# EAGLE board PCB_2D_EBOOK (EAGLE 9.7.0)
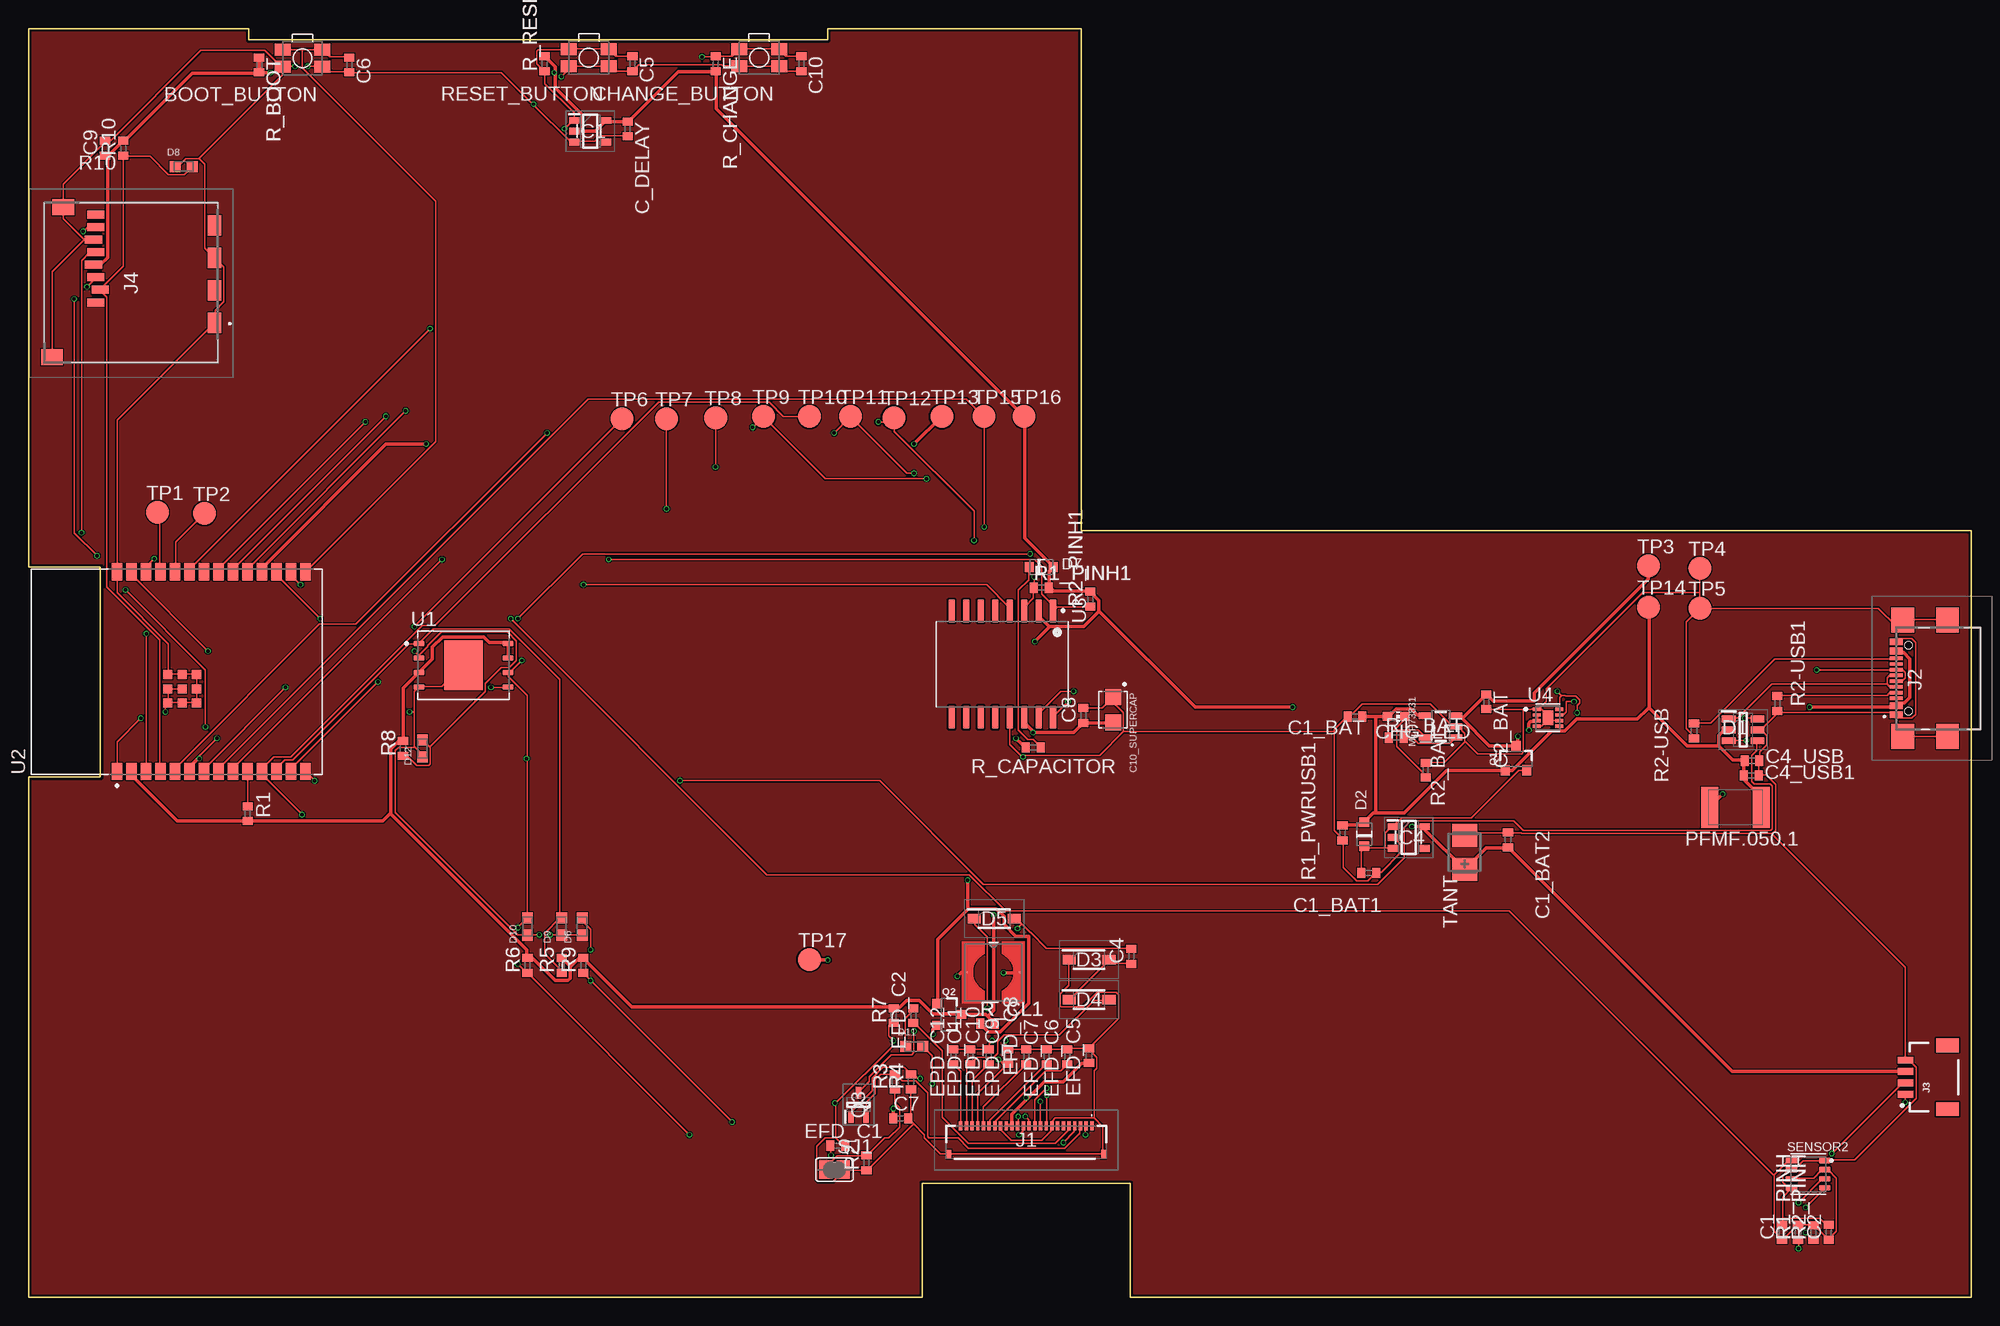
[diagram p0: board, top side]
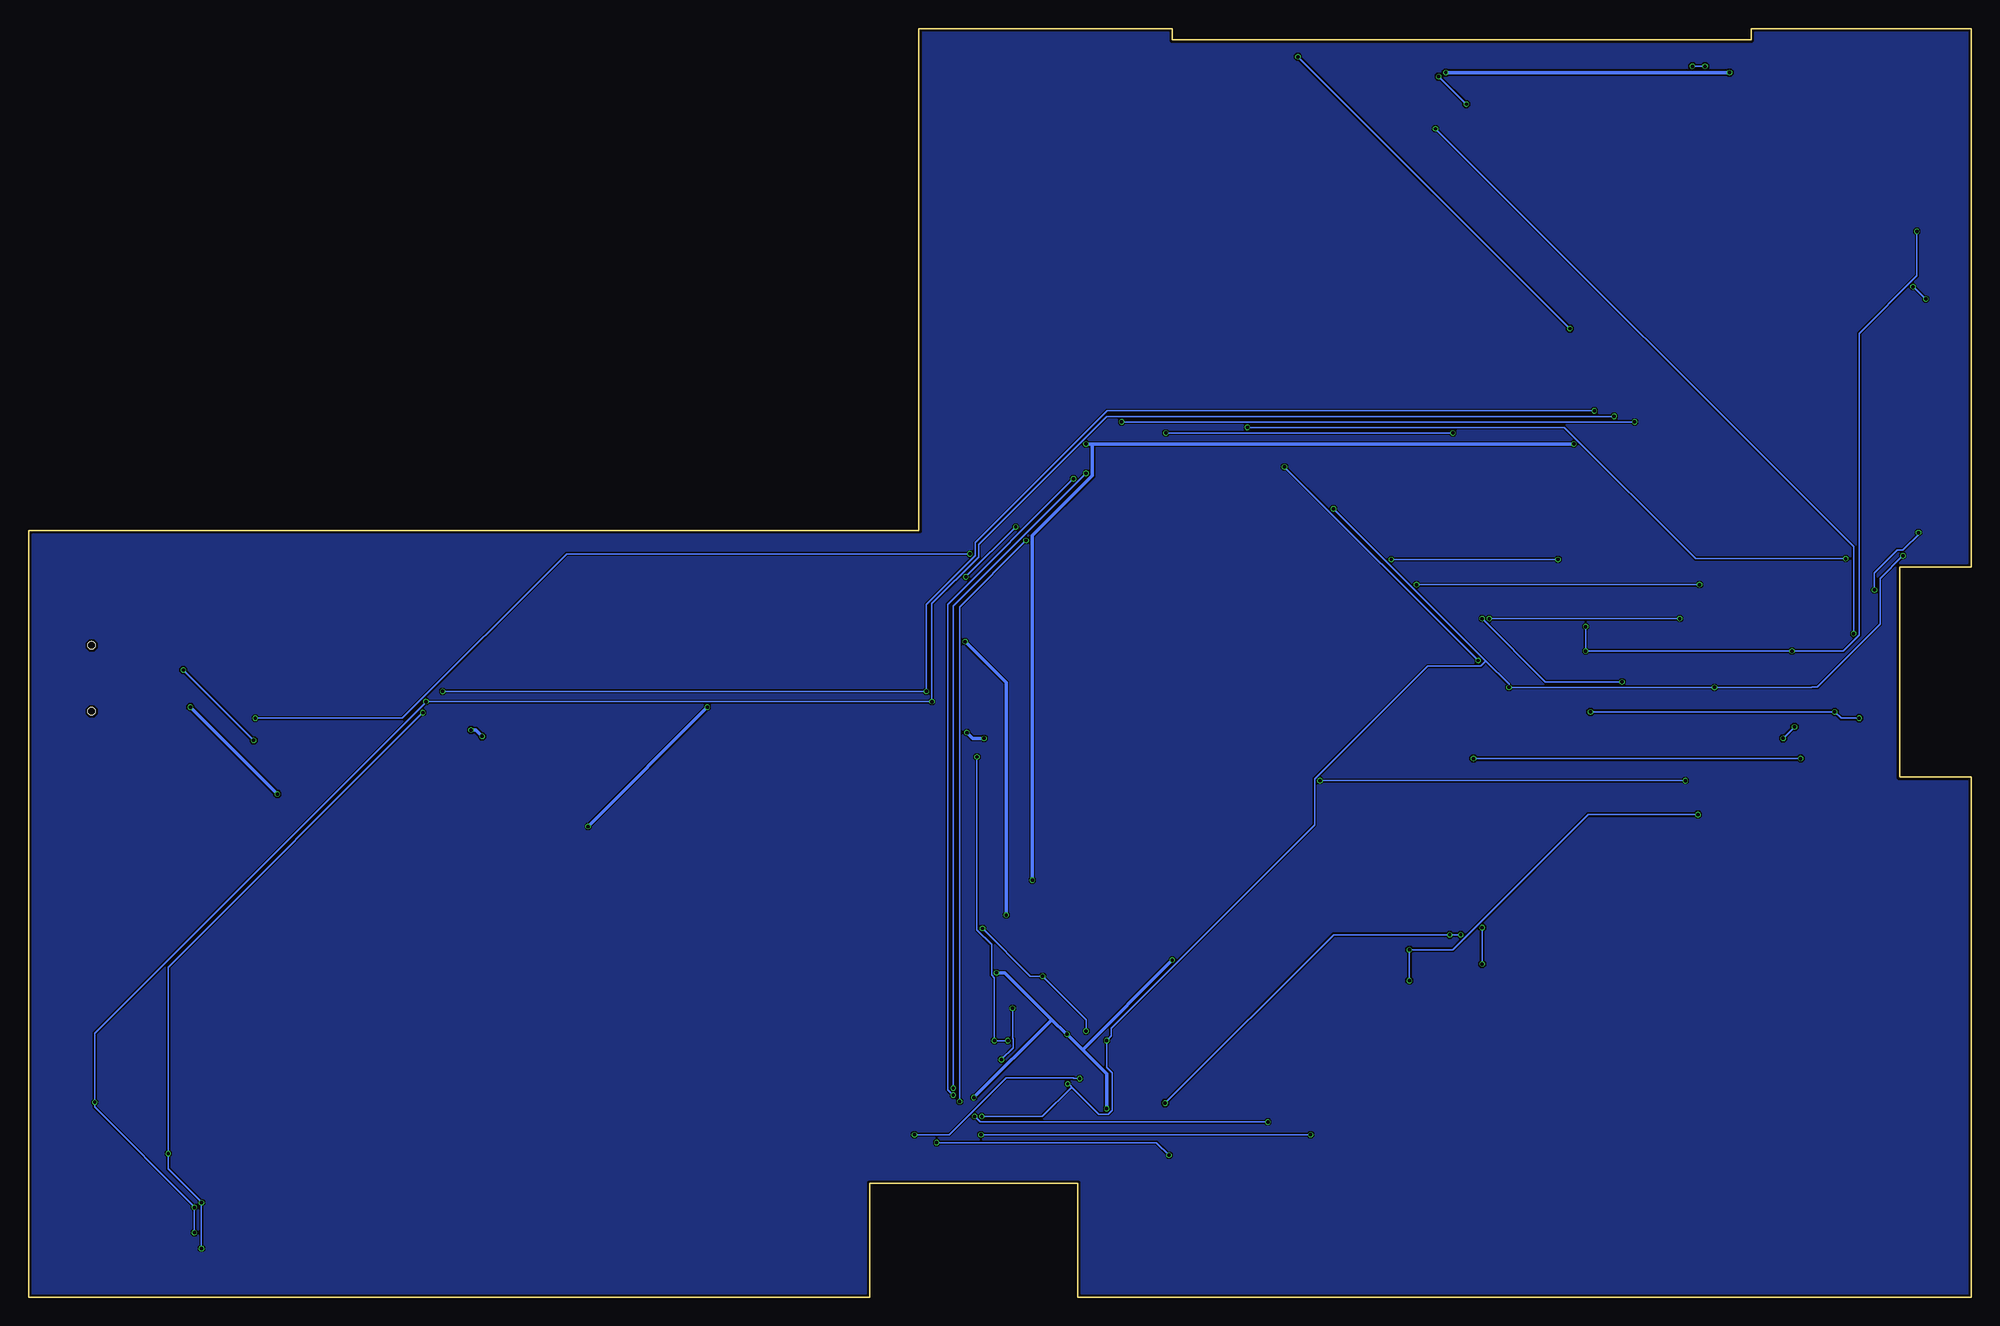
[diagram p1: board, bottom side, seen from below]

Size 170.2 x 111.2 mm. Coordinates in mm from the lower left corner, seen from the top.
Outline: 0,0 78.3,0 78.3,10 96.5,10 96.5,0 170.2,0 170.2,67.2 92.2,67.2 92.2,111.2 70,111.2 70,110.2 19.3,110.2 19.3,111.2 0,111.2 0,64 6.3,64 6.3,45.6 0,45.6 0,0
Copper layers (1*16): Top / Bottom
Stack-up Default Layer Stack: Top User Defined 0.035mm / Dielectric-1 User Defined 1.6mm / Bottom User Defined 0.035mm
Design rules: minimum copper width classes=0 0.15mm, minimum copper width classes=1 0.3mm, minimum drill size 0.3mm, copper clearance wire_polygon to wire_polygon 5mil, copper clearance wire_polygon to pad_smd 5mil, copper clearance wire_polygon to via 5mil, copper clearance pad_smd to pad_smd 5mil, copper clearance pad_smd to via 5mil, copper clearance via to via 5mil, copper clearance smd to pad (same net) 5mil, copper clearance smd to via (same net) 5mil, copper clearance smd to smd (same net) 5mil, dimension clearance 0.2mm, via restrict clearance 0mil, restrict clearance 0mil, drill distance 6mil, keepout clearance 0mil
Net classes: 0 default: width 0.15 mm; 1 POWER: width 0.3 mm

## Footprints (pad centres in the part's own frame; a part is rotated, then mirrored left to right if it is on the bottom)
MYBUTTON = smd 1.4 x 1.05: 1 1.75,0.75; 2 -1.75,0.75; 3 -1.75,-0.75; 4 1.75,-0.75
EAGLE-LTSPICE_C0402 = smd 0.7 x 0.9: 1 -0.65,0; 2 0.65,0
CAPCP3225X100N = smd 1.4 x 1.4: 1 -1.1,0; 2 1.1,0
ADAFRUIT_CHIP-LED0603 = smd 0.8 x 0.8: A 0,-0.75; C 0,0.75
SOT95P280X145-6N = smd 1.2 x 0.6: 1 -1.25,0.95; 2 -1.25,0; 3 -1.25,-0.95; 4 1.25,-0.95; 5 1.25,0; 6 1.25,0.95
ESP32_WROVER_AVX---SD0805S020S1R0_AVX_SD0805S020S1R0_0 = smd 0.8 x 0.9: 1 -1.05,0; 2 1.05,0
SOD3716X135N = smd 1.15 x 0.8: 1 -1.75,0; 2 1.75,0
DIOC1608X36N = smd 0.97 x 0.94: 1 -0.75,0; 2 0.75,0
SOT95P280X125-5N = smd 0.9 x 0.6: 1 -1.4,0.95; 2 -1.4,0; 3 -1.4,-0.95; 4 1.4,-0.95; 5 1.4,0.95
SOT95P280X120-5N = smd 0.9 x 0.6: 1 -1.4,0.95; 2 -1.4,0; 3 -1.4,-0.95; 4 1.4,-0.95; 5 1.4,0.95
FH34SRJ24S05SH99 = smd 0.3 x 0.8: 1 5.75,1.45; 2 5.25,1.45; 3 4.75,1.45; 4 4.25,1.45; 5 3.75,1.45; 6 3.25,1.45; 7 2.75,1.45; 8 2.25,1.45; 9 1.75,1.45; 10 1.25,1.45; 11 0.75,1.45; 12 0.25,1.45; 13 -0.25,1.45; 14 -0.75,1.45; 15 -1.25,1.45; 16 -1.75,1.45; 17 -2.25,1.45; 18 -2.75,1.45; 19 -3.25,1.45; 20 -3.75,1.45; 21 -4.25,1.45; 22 -4.75,1.45; 23 -5.25,1.45; 24 -5.75,1.45 | smd 0.4 x 0.8: MP1 6.75,-1.05; MP2 -6.75,-1.05
SAMACSYS_PARTS_USB4110GFA = smd 0.3 x 1.15: A1 -3.35,3.678; A4 -2.55,3.678; A5 -1.25,3.678; A6 -0.25,3.678; A7 0.25,3.678; A8 1.25,3.678; A9 2.55,3.678; A12 3.35,3.678; B1 3.05,3.678; B4 2.25,3.678; B5 1.75,3.678; B6 0.75,3.678; B7 -0.75,3.678; B8 -1.75,3.678; B9 -2.25,3.678; B12 -3.05,3.678 | smd 2.18 x 2: MP1 -5.11,-0.827; MP2 5.11,-0.827; MP3 -5.11,3.103; MP4 5.11,3.103 | hole 0.65: -2.89,2.603; 2.89,2.603
JST04_1MM_RA = smd 0.6 x 1.35: 1 -1.5,0; 2 -0.5,0; 3 0.5,0; 4 1.5,0 | smd 1.2 x 2: NC1 2.8,-3.675; NC2 -2.8,-3.675
112ATAARR03ATTEND = smd 1.8 x 1.2: G1 10.6,10.4; G2 4.9,10.4; S1 7.75,10.4; S2 2.05,10.4 | smd 1.4 x 1.9: G3 13.6,-3.85; G4 0.45,-2.85 | smd 0.7 x 1.5: P1 8.8,0; P2 7.7,0.4; P3 6.6,0; P4 5.5,-0.2; P5 4.4,0; P6 3.3,-0.2; P7 2.2,0; P8 1.1,0
IND_4828-WE-TPC_WRE = smd 0.127 x 0.127: 1 -2.286,0; 2 2.286,0
ESP32_WROVER_SPARKFUN-IC-POWER_SOT23-5 = smd 0.55 x 1.2: 1 -0.95,-1.3; 2 0,-1.3; 3 0.95,-1.3; 4 0.95,1.3; 5 -0.95,1.3
ESP32C6_VARISTOR_CT/CN1812 = smd 1.5 x 3.6: 1 -2.25,0; 2 2.25,0
ESP32_WROVER_SPARKFUN-DISCRETESEMI_SOT23-3 = smd 0.8 x 0.9: 1 -0.95,-1; 2 0.95,-1; 3 0,1.1
SOT65P210X110-3N = smd 1.05 x 0.5: 1 -1.05,0.65; 2 -1.05,-0.65; 3 1.05,0
ESP32_WROVER_EAGLE-LTSPICE_R0402 = smd 0.7 x 0.9: 1 -0.65,0; 2 0.65,0
ESP32_WROVER_BME680_PSON80P300X300X100-8N = smd 1.016 x 0.5: 1 1.458,1.2; 2 1.458,0.4; 3 1.458,-0.4; 4 1.458,-1.2; 5 -1.458,-1.22; 6 -1.458,-0.4; 7 -1.458,0.4; 8 -1.458,1.2
SJ = smd 1.168 x 1.6: 1 -0.762,0; 2 0.762,0
RCL_CT3528 = smd 2 x 2.2: + -1.5,0; - 1.5,0
TP20R = smd 2 x 2: TP 0,0
SON127P600X800X80-9N = smd 0.94 x 0.44: 1 -3.895,1.905; 2 -3.895,0.635; 3 -3.895,-0.635; 4 -3.895,-1.905; 5 3.895,-1.905; 6 3.895,-0.635; 7 3.895,0.635; 8 3.895,1.905 | smd 3.4 x 4.3: 9 0,0
XCVR_ESP32-C6-WROOM-1-N8 = smd 1.5 x 0.9: 1 -8.75,5.26; 2 -8.75,3.99; 3 -8.75,2.72; 4 -8.75,1.45; 5 -8.75,0.18; 6 -8.75,-1.09; 7 -8.75,-2.36; 8 -8.75,-3.63; 9 -8.75,-4.9; 10 -8.75,-6.17; 11 -8.75,-7.44; 12 -8.75,-8.71; 13 -8.75,-9.98; 14 -8.75,-11.25; 15 8.75,-11.25; 16 8.75,-9.98; 17 8.75,-8.71; 18 8.75,-7.44; 19 8.75,-6.17; 20 8.75,-4.9; 21 8.75,-3.63; 22 8.75,-2.36; 23 8.75,-1.09; 24 8.75,0.18; 25 8.75,1.45; 26 8.75,2.72; 27 8.75,3.99; 28 8.75,5.26 | smd 0.8 x 0.8: 29_1 -2.755,0.79; 29_2 -1.505,0.79; 29_3 -0.255,0.79; 29_4 -2.755,-0.46; 29_5 -1.505,-0.46; 29_6 -0.255,-0.46; 29_7 -2.755,-1.71; 29_8 -1.505,-1.71; 29_9 -0.255,-1.71
SOIC127P1032X265-16N = smd 2.05 x 0.59: 1 -4.655,4.445; 2 -4.655,3.175; 3 -4.655,1.905; 4 -4.655,0.635; 5 -4.655,-0.635; 6 -4.655,-1.905; 7 -4.655,-3.175; 8 -4.655,-4.445; 9 4.655,-4.445; 10 4.655,-3.175; 11 4.655,-1.905; 12 4.655,-0.635; 13 4.655,0.635; 14 4.655,1.905; 15 4.655,3.175; 16 4.655,4.445
SON50P200X200X80-9N = smd 0.76 x 0.27: 1 -0.985,0.75; 2 -0.985,0.25; 3 -0.985,-0.25; 4 -0.985,-0.75; 5 0.985,-0.75; 6 0.985,-0.25; 7 0.985,0.25; 8 0.985,0.75 | smd 0.9 x 1.3: 9 0,0

## Placement (x,y rotation side)
BOOT_BUTTON  BUTTON_CUSYOMV1  [MYBUTTON]  24,108.6 180 top
C1  100nF  [EAGLE-LTSPICE_C0402]  153.6,5.7 90 top
C1_BAT  4.7uF  [EAGLE-LTSPICE_C0402]  116.2,50.9 180 top
C1_BAT1  4.7uF  [EAGLE-LTSPICE_C0402]  117.4,37.2 0 top
C1_BAT2  4.7uF  [EAGLE-LTSPICE_C0402]  129.6,40.1 90 top
C2  100nF  [EAGLE-LTSPICE_C0402]  157.7,5.7 90 top
C2_BAT  4.7uF  [EAGLE-LTSPICE_C0402]  127.7,52.2 270 top
C4  4.7uF/25V  [EAGLE-LTSPICE_C0402]  96.6,29.9 90 top
C4_USB  4.7uF  [EAGLE-LTSPICE_C0402]  150.98,47.04 0 top
C4_USB1  100nF  [EAGLE-LTSPICE_C0402]  150.91,45.75 0 top
C5  1uF  [EAGLE-LTSPICE_C0402]  52.9,108.11 270 top
C6  100nF  [EAGLE-LTSPICE_C0402]  28.1,108.01 270 top
C7  10uF  [EAGLE-LTSPICE_C0402]  76.4,15.7 0 top
C8  100nF  [EAGLE-LTSPICE_C0402]  92.4,51 90 top
C9  100nF  [EAGLE-LTSPICE_C0402]  6.7,100.72 90 top
C10  100nF  [EAGLE-LTSPICE_C0402]  67.7,108.11 270 top
C10_SUPERCAP  CPH3225A  [CAPCP3225X100N]  95,51.5 270 top
C_DELAY  100nF  [EAGLE-LTSPICE_C0402]  52.5,102.4 270 top
CHANGE_BUTTON  BUTTON_CUSYOMV1  [MYBUTTON]  64,108.65 180 top
CHG_LED  [ADAFRUIT_CHIP-LED0603]  119.8,50.9 270 top
D1  USBLC6-2SC6Y  [SOT95P280X145-6N]  150.19,49.74 0 top
D2  ESP32_WROVER_AVX---SD0805S020S1R0_AVX_SD0805S020S1R0_0_0AVX_SD0805S020S1R0_0_0  [ESP32_WROVER_AVX---SD0805S020S1R0_AVX_SD0805S020S1R0_0]  117,40.6 90 top
D3  MBR0530  [SOD3716X135N]  92.9,29.6 0 top
D4  MBR0530  [SOD3716X135N]  92.9,26.1 0 top
D5  MBR0530  [SOD3716X135N]  84.6,33.2 0 top
D6  PGB1010603MR  [DIOC1608X36N]  48.5,32.5 90 top
D7  ESP32_WROVER_AVX---SD0805S020S1R0_AVX_SD0805S020S1R0_0_0AVX_SD0805S020S1R0_0_0  [ESP32_WROVER_AVX---SD0805S020S1R0_AVX_SD0805S020S1R0_0]  88.7,64 0 top
D8  PGB1010603MR  [DIOC1608X36N]  13.6,99.1 0 top
D9  PGB1010603MR  [DIOC1608X36N]  46.7,32.5 90 top
D10  PGB1010603MR  [DIOC1608X36N]  43.7,32.5 90 top
D11  PGB1010603MR  [DIOC1608X36N]  77.6,22 0 top
D12  PGB1010603MR  [DIOC1608X36N]  34.5,48.1 90 top
EFD_C1  1uF/50V  [EAGLE-LTSPICE_C0402]  70.9,13.3 0 top
EFD_C2  1uF/50V  [EAGLE-LTSPICE_C0402]  77.5,24.7 90 top
EFD_C5  1uF/50V  [EAGLE-LTSPICE_C0402]  92.9,21.2 90 top
EFD_C6  1uF/50V  [EAGLE-LTSPICE_C0402]  91,21.1 90 top
EFD_C7  1uF/50V  [EAGLE-LTSPICE_C0402]  89.2,21.1 90 top
EPD_C8  1uF/50V  [EAGLE-LTSPICE_C0402]  87.4,21.1 90 top
EPD_C9  1uF/50V  [EAGLE-LTSPICE_C0402]  85.8,21.1 90 top
EPD_C10  1uF/50V  [EAGLE-LTSPICE_C0402]  84.1,21.1 90 top
EPD_C11  1uF/50V  [EAGLE-LTSPICE_C0402]  82.5,21.1 90 top
EPD_C12  1uF/50V  [EAGLE-LTSPICE_C0402]  81,21.1 90 top
IC1  BD5229G-TR  [SOT95P280X125-5N]  49.2,102.2 0 top
IC4  XC6220A331MR-G  [SOT95P280X120-5N]  120.9,40.3 0 top
J1  FH34SRJ-24S-0.5SH_99_  [FH34SRJ24S05SH99]  87.4,13.6 0 top
J2  SAMACSYS_PARTS_USB4110-GF-A  [SAMACSYS_PARTS_USB4110GFA]  167.28,54.26 90 top
J3  QWIIC_RIGHT_ANGLE  [JST04_1MM_RA]  164.43,19.3 90 top
J4  112A-TAAR-R03_ATTEND  [112ATAARR03ATTEND]  5.89,96 270 top
L1  744043680IND_4828-WE-TPC_WRE  [IND_4828-WE-TPC_WRE]  84.51,28.5 0 top
MCP73831  ESP32_WROVER_SPARKFUN-IC-POWER_MCP73831  [ESP32_WROVER_SPARKFUN-IC-POWER_SOT23-5]  123.7,50.03 90 top
PFMF.050.1  ESP32C6_VARISTORCN1812  [ESP32C6_VARISTOR_CT/CN1812]  149.52,42.96 0 top
Q1  20V/4.2A/52mΩ/1.4W  [ESP32_WROVER_SPARKFUN-DISCRETESEMI_SOT23-3]  130.3,47.2 0 top
Q2  20V/4.2A/52mΩ/1.4W  [ESP32_WROVER_SPARKFUN-DISCRETESEMI_SOT23-3]  80.6,24.8 270 top
Q3  SI1308EDL-T1-GE3  [SOT65P210X110-3N]  72.7,16.9 90 top
R1  10K  [ESP32_WROVER_EAGLE-LTSPICE_R0402]  19.2,42.4 270 top
R1_BAT  200  [ESP32_WROVER_EAGLE-LTSPICE_R0402]  119.82,49.06 0 top
R1_PINH  10K  [ESP32_WROVER_EAGLE-LTSPICE_R0402]  155,5.7 90 top
R1_PINH1  10K  [ESP32_WROVER_EAGLE-LTSPICE_R0402]  88.7,62.2 0 top
R1_PWRUSB1  100K  [ESP32_WROVER_EAGLE-LTSPICE_R0402]  115.1,40.7 90 top
R2  2.2  [ESP32_WROVER_EAGLE-LTSPICE_R0402]  73.4,11.8 90 top
R2-USB  5k1  [ESP32_WROVER_EAGLE-LTSPICE_R0402]  145.89,49.64 270 top
R2-USB1  10K  [ESP32_WROVER_EAGLE-LTSPICE_R0402]  153.18,52.05 90 top
R2_BAT  2K  [ESP32_WROVER_EAGLE-LTSPICE_R0402]  122.4,46.2 270 top
R2_PINH  10K  [ESP32_WROVER_EAGLE-LTSPICE_R0402]  156.35,5.69 90 top
R2_PINH1  10K  [ESP32_WROVER_EAGLE-LTSPICE_R0402]  93,61.2 90 top
R3  0.47  [ESP32_WROVER_EAGLE-LTSPICE_R0402]  75.9,18.9 90 top
R4  10K  [ESP32_WROVER_EAGLE-LTSPICE_R0402]  77.3,18.9 90 top
R5  10K  [ESP32_WROVER_EAGLE-LTSPICE_R0402]  46.7,29.1 90 top
R6  10K  [ESP32_WROVER_EAGLE-LTSPICE_R0402]  43.7,29.1 90 top
R7  10K  [ESP32_WROVER_EAGLE-LTSPICE_R0402]  75.8,24.7 90 top
R8  10K  [ESP32_WROVER_EAGLE-LTSPICE_R0402]  32.8,48.1 90 top
R9  10K  [ESP32_WROVER_EAGLE-LTSPICE_R0402]  48.6,29.1 90 top
R10  10K  [ESP32_WROVER_EAGLE-LTSPICE_R0402]  8.3,100.7 90 top
R_BOOT  10K  [ESP32_WROVER_EAGLE-LTSPICE_R0402]  20.2,108.01 270 top
R_CAPACITOR  15  [ESP32_WROVER_EAGLE-LTSPICE_R0402]  88,48.2 180 top
R_CHANGE  10K  [ESP32_WROVER_EAGLE-LTSPICE_R0402]  60.2,108.11 270 top
R_CL1  10K  [ESP32_WROVER_EAGLE-LTSPICE_R0402]  84,24 0 top
R_RESET  10K  [ESP32_WROVER_EAGLE-LTSPICE_R0402]  45.2,108.11 90 top
RESET_BUTTON  BUTTON_CUSYOMV1  [MYBUTTON]  49.08,108.65 180 top
SENSOR2  ESP32_WROVER_BME680_BME680  [ESP32_WROVER_BME680_PSON80P300X300X100-8N]  155.9,10.8 0 top
SJ1  [SJ]  70.6,11.2 180 top
TANT  100uF  [RCL_CT3528]  125.8,39 90 top
TP1  TPTP20R  [TP20R]  11.3,68.8 0 top
TP2  TPTP20R  [TP20R]  15.4,68.7 0 top
TP3  TPTP20R  [TP20R]  141.9,64.1 0 top
TP4  TPTP20R  [TP20R]  146.4,63.9 0 top
TP5  TPTP20R  [TP20R]  146.4,60.4 0 top
TP6  TPTP20R  [TP20R]  52,77 0 top
TP7  TPTP20R  [TP20R]  55.9,77 0 top
TP8  TPTP20R  [TP20R]  60.2,77.1 0 top
TP9  TPTP20R  [TP20R]  64.4,77.2 0 top
TP10  TPTP20R  [TP20R]  68.4,77.2 0 top
TP11  TPTP20R  [TP20R]  72,77.2 0 top
TP12  TPTP20R  [TP20R]  75.8,77.1 0 top
TP13  TPTP20R  [TP20R]  80,77.2 0 top
TP14  TPTP20R  [TP20R]  141.9,60.5 0 top
TP15  TPTP20R  [TP20R]  83.7,77.2 0 top
TP16  TPTP20R  [TP20R]  87.2,77.2 0 top
TP17  TPTP20R  [TP20R]  68.4,29.6 0 top
U1  W25Q512JVEIQ  [SON127P600X800X80-9N]  38.1,55.4 0 top
U2  ESP32-C6-WROOM-1-N8  [XCVR_ESP32-C6-WROOM-1-N8]  13,54.84 90 top
U3  DS3231SN#  [SOIC127P1032X265-16N]  85.3,55.5 270 top
U4  MAX17048G+T10  [SON50P200X200X80-9N]  133.1,50.8 0 top

## Library data of the parts
BOOT_BUTTON CHANGE_BUTTON CHG_LED PFMF.050.1 RESET_BUTTON SJ1 TP1-TP17 = DeskAssistant v19 v1
C1 C1_BAT C1_BAT1 C1_BAT2 C2 C2_BAT C4 C4_USB C4_USB1 C5-C10 C_DELAY EFD_C1 EFD_C2 EFD_C5-EFD_C7 EPD_C8-EPD_C12 = DeskAssistant v19 v1; SPICEMODEL: NONE; SPICEPREFIX: C
C10_SUPERCAP = DeskAssistant v19 v1; AVAILABILITY: Not in stock; CHECK_PRICES: https://www.snapeda.com/parts/CPH3225A/Seiko+Instruments/view-part/?ref=eda; DESCRIPTION: 11 mF (EDLC) Supercapacitor 3.3 V 1210 (3225 Metric) - -; MF: Seiko Instruments; MP: CPH3225A; PACKAGE: 1210 Seiko; PRICE: None; PURCHASE-URL: https://www.snapeda.com/api/url_track_click_mouser/?unipart_id=562593&manufacturer=Seiko Instruments&part_name=CPH3225A&search_term=None; SNAPEDA_LINK: https://www.snapeda.com/parts/CPH3225A/Seiko+Instruments/view-part/?ref=snap
D1 = DeskAssistant v19 v1; AVAILABILITY: In Stock; CHECK_PRICES: https://www.snapeda.com/parts/USBLC6-2SC6Y/STMicroelectronics/view-part/?ref=eda; DESCRIPTION: 17V Clamp 5A (8/20µs) Ipp Tvs Diode Surface Mount SOT-23-6; MF: STMicroelectronics; MP: USBLC6-2SC6Y; PACKAGE: SOT-23-6 STMicroelectronics; PRICE: None; SNAPEDA_LINK: https://www.snapeda.com/parts/USBLC6-2SC6Y/STMicroelectronics/view-part/?ref=snap
D2 D7 = DeskAssistant v19 v1; CENTROID_NOT_SPECIFIED: No; DATASHEET: http://datasheets.avx.com/schottky.pdf; DIGIKEY_DESCRIPTION: DIODE SCHOTTKY 20V 1A 0805; DIGIKEY_PART_NUMBER: 478-7800-1-ND; LEAD_FREE: yes; MF: AVX; MOUSER_PART_NUMBER: 581-SD0805S020S1R0; PACKAGE: 0805 (2012 metric); PREFIX: D; ROHS: yes; TEMPERATURE_RANGE_HIGH: +125°C; TEMPERATURE_RANGE_LOW: -55°C
D3-D5 = DeskAssistant v19 v1; AVAILABILITY: In Stock; CHECK_PRICES: https://www.snapeda.com/parts/MBR0530/Onsemi/view-part/?ref=eda; DESCRIPTION: Diode Schottky 30 V 500mA Surface Mount SOD-123; MF: ON Semiconductor; MP: MBR0530; PACKAGE: SOD-123-2 ON Semiconductor; PRICE: None; PURCHASE-URL: https://www.snapeda.com/api/url_track_click_mouser/?unipart_id=179458&manufacturer=ON Semiconductor&part_name=MBR0530&search_term=None; SNAPEDA_LINK: https://www.snapeda.com/parts/MBR0530/Onsemi/view-part/?ref=snap
D6 D8-D12 = DeskAssistant v19 v1; AVAILABILITY: In Stock; CHECK_PRICES: https://www.snapeda.com/parts/PGB1010603MR/Littelfuse/view-part/?ref=eda; DESCRIPTION: 150V (Typ) Clamp - Ipp Tvs Diode Surface Mount 0603 (1608 Metric); MF: Littelfuse Inc.; MP: PGB1010603MR; PACKAGE: 0603 Littelfuse Inc.; PRICE: None; PURCHASE-URL: https://www.snapeda.com/api/url_track_click_mouser/?unipart_id=5659453&manufacturer=Littelfuse Inc.&part_name=PGB1010603MR&search_term=None; SNAPEDA_LINK: https://www.snapeda.com/parts/PGB1010603MR/Littelfuse/view-part/?ref=snap
IC1 = DeskAssistant v19 v1; DESCRIPTION: Voltage Detector with Adjustable Delay Time: CMOS processes are utilized to develop high precision, low current consumption CMOS reset ICs that allow arbitrary setting of the delay time. The extensive lineup includes both Nch Open Drain and CMOS output types in a wide range of detection voltages (from 2.3V to 6.0V, in 0.1V steps), enabling selection of the ideal solution based on customer requirements. In addition, the entire series is of course both lead-free and RoHS-compliant.; HEIGHT: 1.25mm; MANUFACTURER_NAME: ROHM Semiconductor; MANUFACTURER_PART_NUMBER: BD5229G-TR; MOUSER_PART_NUMBER: 755-BD5229G-TR; MOUSER_PRICE-STOCK: https://www.mouser.co.uk/ProductDetail/ROHM-Semiconductor/BD5229G-TR?qs=4kLU8WoGk0vvnhrrYwdszw%3D%3D
IC4 = DeskAssistant v19 v1; DESCRIPTION: LDO Voltage Regulators; HEIGHT: 1.2mm; MANUFACTURER_NAME: Torex; MANUFACTURER_PART_NUMBER: XC6220A331MR-G; MOUSER_PART_NUMBER: 865-XC6220A331MR-G; MOUSER_PRICE-STOCK: https://www.mouser.co.uk/ProductDetail/Torex-Semiconductor/XC6220A331MR-G?qs=AsjdqWjXhJ8ZSWznL1J0gg%3D%3D
J1 = DeskAssistant v19 v1; DESCRIPTION: 24 Position FFC, FPC Connector Contacts, Top and Bottom 0.020" (0.50mm) Surface Mount, Right Angle; HEIGHT: 1.1mm; MANUFACTURER_NAME: Hirose; MANUFACTURER_PART_NUMBER: FH34SRJ-24S-0.5SH(99); MOUSER_PART_NUMBER: 798-FH34SRJ24S05SH99; MOUSER_PRICE-STOCK: https://www.mouser.co.uk/ProductDetail/Hirose-Connector/FH34SRJ-24S-0.5SH99?qs=vcbW%252B4%252BSTIpKBl5ap9J8Fw%3D%3D
J2 = DeskAssistant v19 v1; DESCRIPTION: CONN USB 2.0 TYPE-C R/A SMT; HEIGHT: 3.26mm; MANUFACTURER_NAME: GCT (GLOBAL CONNECTOR TECHNOLOGY); MANUFACTURER_PART_NUMBER: USB4110-GF-A; MOUSER_PART_NUMBER: 640-USB4110-GF-A; MOUSER_PRICE-STOCK: https://www.mouser.co.uk/ProductDetail/GCT/USB4110-GF-A?qs=KUoIvG%2F9IlYiZvIXQjyJeA%3D%3D
J3 = DeskAssistant v19 v1; PROD_ID: CONN-13694
J4 = DeskAssistant v19 v1; DESCRIPTION: Micro SD Card Socket, Push-Push Type, Top Mount, SMT, H=1.83mm, 10u; HEIGHT: 1.9mm; MANUFACTURER_NAME: ATTEND; MANUFACTURER_PART_NUMBER: 112A-TAAR-R03 ATTEND
L1 = DeskAssistant v19 v1; COPYRIGHT: Copyright (C) 2024 Ultra Librarian. All rights reserved.; MANUFACTURER_PART_NUMBER: 744043680; MFR_NAME: Wurth Electronics
MCP73831 = DeskAssistant v19 v1; PROD_ID: IC-09995
Q1 Q2 = DeskAssistant v19 v1; PROD_ID: TRAN-14388
Q3 = DeskAssistant v19 v1; AVAILABILITY: In Stock; CHECK_PRICES: https://www.snapeda.com/parts/SI1308EDL-T1-GE3/Vishay+Siliconix/view-part/?ref=eda; DESCRIPTION: Si1308EDL-T1-GE3 N-channel MOSFET Transistor, 1.5 A, 30 V, 3-Pin SC-70 | Siliconix / Vishay SI1308EDL-T1-GE3; MF: Vishay Siliconix; MP: SI1308EDL-T1-GE3; PACKAGE: SOT-323 Vishay Semiconductor; PRICE: None; PURCHASE-URL: https://www.snapeda.com/api/url_track_click_mouser/?unipart_id=274603&manufacturer=Vishay Siliconix&part_name=SI1308EDL-T1-GE3&search_term=None; SNAPEDA_LINK: https://www.snapeda.com/parts/SI1308EDL-T1-GE3/Vishay+Siliconix/view-part/?ref=snap
R1 R1_BAT R1_PINH R1_PINH1 R1_PWRUSB1 R2 R2-USB R2-USB1 R2_BAT R2_PINH R2_PINH1 R3-R10 R_BOOT R_CAPACITOR R_CHANGE R_CL1 R_RESET = DeskAssistant v19 v1; SPICEMODEL: NONE; SPICEPREFIX: R
SENSOR2 = DeskAssistant v19 v1; AVAILABILITY: Unavailable; DESCRIPTION: Integrated Environmental Unit; MF: Bosch Sensortec; MP: BME680; PACKAGE: LGA-8 Bosch Tools; PRICE: None
TANT = DeskAssistant v19 v1; SPICEPREFIX: C
U1 = DeskAssistant v19 v1; AVAILABILITY: In Stock; CHECK_PRICES: https://www.snapeda.com/parts/W25Q512JVEIQ/Winbond+Electronics/view-part/?ref=eda; DESCRIPTION: FLASH - NOR Memory IC 512Mb (64M x 8) SPI - Quad I/O 133 MHz 8-WSON (8x6); MF: Winbond Electronics; MP: W25Q512JVEIQ; PACKAGE: Package; PRICE: None; SNAPEDA_LINK: https://www.snapeda.com/parts/W25Q512JVEIQ/Winbond+Electronics/view-part/?ref=snap
U2 = DeskAssistant v19 v1; AVAILABILITY: In Stock; CHECK_PRICES: https://www.snapeda.com/parts/ESP32-C6-WROOM-1-N8/Espressif+Systems/view-part/?ref=eda; DESCRIPTION: Multiprotocol Modules ESP32-C6 module, Wi-Fi 6 in 2.4 GHz band, Bluetooth 5, Zigbee 3.0 and Thread. ESP34-WROOM Compatible - ENGINEERING SAMPLE; MF: Espressif Systems; MP: ESP32-C6-WROOM-1-N8; PACKAGE: None; PRICE: None; SNAPEDA_LINK: https://www.snapeda.com/parts/ESP32-C6-WROOM-1-N8/Espressif+Systems/view-part/?ref=snap
U3 = DeskAssistant v19 v1; AVAILABILITY: In Stock; CHECK_PRICES: https://www.snapeda.com/parts/DS3231SN%23/Analog+Devices/view-part/?ref=eda; DESCRIPTION: Extremely Accurate I²C-Integrated RTC/TCXO/Crystal; MF: Analog Devices; MP: DS3231SN#; PACKAGE: SOIC-16 Maxim; PRICE: None; PURCHASE-URL: https://www.snapeda.com/api/url_track_click_mouser/?unipart_id=99048&manufacturer=Analog Devices&part_name=DS3231SN#&search_term=None; SNAPEDA_LINK: https://www.snapeda.com/parts/DS3231SN%23/Analog+Devices/view-part/?ref=snap
U4 = DeskAssistant v19 v1; AVAILABILITY: In Stock; CHECK_PRICES: https://www.snapeda.com/parts/MAX17048G+T10/Analog+Devices/view-part/?ref=eda; DESCRIPTION: 3µA 1-Cell/2-Cell Fuel Gauge with ModelGauge; MF: Analog Devices; MP: MAX17048G+T10; PACKAGE: TDFN-8 Maxim; PRICE: None; PURCHASE-URL: https://www.snapeda.com/api/url_track_click_mouser/?unipart_id=329239&manufacturer=Analog Devices&part_name=MAX17048G+T10&search_term=None; SNAPEDA_LINK: https://www.snapeda.com/parts/MAX17048G+T10/Analog+Devices/view-part/?ref=snap

## Nets
3V3 [POWER]: C1_BAT2.1 C9.1 C_DELAY.1 D7.2 IC1.2 IC1.5 IC4.5 J3.3 J4.P4 Q2.3 R1.2 R1_PINH1.2 R2_PINH1.2 R5.2 R6.2 R7.2 R8.2 R9.2 R10.2 R_BOOT.1 R_BOOT.2 R_CHANGE.2 R_CL1.2 R_RESET.2 TANT.+ TP16.TP U1.3 U1.7 U1.8 U2.2 U3.2
32KHZ: R2_PINH1.1 U2.9 U3.1
DN: D1.1 J2.A7 J2.B7
DP: D1.3 J2.A6 J2.B6
EPD_3V3 [POWER]: C7.1 EFD_C5.1 J1.15 J1.16 L1.2 Q2.2 TP17.TP
EPD_3V3_C [POWER]: Q2.1 R_CL1.1 TP13.TP U2.18
EPD_BUSY: J1.9 TP9.TP U2.26
EPD_CS: D6.2 J1.12 R9.1 TP10.TP U2.11
EPD_DC: J1.11 TP11.TP U2.5
EPD_RST: J1.10 TP12.TP U2.21
FLASH_CS: D9.2 R5.1 U1.1 U2.12
GDR: J1.2 Q3.1 R4.2
GND: BOOT_BUTTON.1 BOOT_BUTTON.2 C1.2 C1_BAT1.2 C1_BAT2.2 C1_BAT.2 C2.2 C2_BAT.2 C4_USB1.2 C4_USB.2 C5.2 C6.2 C7.2 C8.2 C9.2 C10.2 C10_SUPERCAP.1 C_DELAY.2 CHANGE_BUTTON.1 CHANGE_BUTTON.2 D1.5 D3.1 D6.1 D8.1 D9.1 D10.1 D11.1 D12.1 EFD_C1.2 EFD_C2.2 EFD_C5.2 EFD_C6.2 EFD_C7.2 EPD_C8.2 EPD_C9.2 EPD_C10.2 EPD_C11.2 EPD_C12.2 IC1.3 IC4.2 J1.8 J1.17 J1.MP1 J1.MP2 J2.A1 J2.A12 J2.B1 J2.B12 J2.MP1 J2.MP2 J2.MP3 J2.MP4 J3.4 J4.G1 J4.G2 J4.G3 J4.G4 J4.P6 MCP73831.2 R1_PWRUSB1.1 R2-USB1.1 R2-USB.2 R2.1 R2_BAT.1 R4.1 RESET_BUTTON.1 RESET_BUTTON.2 SENSOR2.1 SENSOR2.5 SENSOR2.7 SJ1.1 TANT.- TP4.TP TP5.TP U1.4 U1.9 U2.1 U2.28 U2.29_1 U2.29_2 U2.29_3 U2.29_4 U2.29_5 U2.29_6 U2.29_7 U2.29_8 U2.29_9 U3.13 U4.1 U4.4 U4.6 U4.9
GPIO8: R1.1 U2.10
I2C_PW: C1.1 C2.1 R1_PINH.2 R2_PINH.2 SENSOR2.2 SENSOR2.6 SENSOR2.8 U2.17
INT_RTC: R1_PINH1.1 TP15.TP U2.8 U3.3
IO/BOOT: BOOT_BUTTON.3 BOOT_BUTTON.4 C6.1 U2.15
IO/CHANGE: C10.1 CHANGE_BUTTON.3 CHANGE_BUTTON.4 R_CHANGE.1 U2.23
MISO: D12.2 J4.P7 R8.1 TP6.TP U1.2 U2.27
MOSI: D11.2 J1.14 J4.P3 R7.1 TP7.TP U1.5 U2.7
N$1: J2.B5 R2-USB.1
N$2: C1_BAT1.1 D2.1 IC4.1 IC4.3 Q1.2
N$3: MCP73831.1 R1_BAT.2
N$4: CHG_LED.C R1_BAT.1
N$5: MCP73831.5 R2_BAT.2
N$10: C4.1 D3.2 D4.1
N$11: J2.A5 R2-USB1.2
N$13: D7.1 R_CAPACITOR.1
N$14: EFD_C2.1 J1.5
N$15: EFD_C1.1 J1.4
N$17: EPD_C12.1 J1.24
N$19: EPD_C10.1 J1.22
N$21: EPD_C8.1 J1.20
N$22: EFD_C7.1 J1.19
N$23: EFD_C6.1 J1.18
PREVGH: D5.1 EPD_C9.1 J1.21
PREVGL: D4.2 EPD_C11.1 J1.23
RESE: J1.3 Q3.2 R3.2
RESE': R2.2 R3.1 SJ1.2
RESET: C5.1 IC1.1 R_RESET.1 RESET_BUTTON.3 RESET_BUTTON.4 U2.3
RTC_RST: U2.16 U3.4
RX: TP2.TP U2.24
SCK: D10.2 J1.13 J4.P5 R6.1 TP8.TP U1.6 U2.6
SCL: J3.1 R2_PINH.1 SENSOR2.4 U2.20 U3.16 U4.7
SDA: J3.2 R1_PINH.1 SENSOR2.3 U2.19 U3.15 U4.8
SRC: C4.2 D5.2 L1.1 Q3.3
SS_SD: D8.2 J4.P2 R10.1 U2.4
TX: TP1.TP U2.25
USB_D+: D1.4 U2.14
USB_D-: D1.6 U2.13
VBAT [POWER]: C2_BAT.1 MCP73831.3 Q1.3 TP3.TP U4.2 U4.3
VBUS [POWER]: C1_BAT.1 C4_USB1.1 C4_USB.1 CHG_LED.A D1.2 D2.2 MCP73831.4 PFMF.050.1.2 Q1.1 R1_PWRUSB1.2 TP14.TP
VRTC [POWER]: C8.1 C10_SUPERCAP.2 R_CAPACITOR.2 U3.14
VUSB [POWER]: J2.A4 J2.A9 J2.B4 J2.B9 PFMF.050.1.1

## Tracks (layer width: path | path; a pad name or v marks a point on that pad's centre or on a via)
3V3  (via drill 0.3)
  Top 0.3: U2.2 9.07,46.05 9.07,45.7 13.02,41.76 19.18,41.76 R1.2 19.32,41.76 31.02,41.76 31.58,42.31 31.72,42.38 | 84.03,24.62 84.62,24.03 R_CL1.2 | 84.03,24.62 83.86,24.79 81.72,24.79 Q2.3 81.58,24.86 79.22,24.86 78.05,26.04 76.94,26.04 76.31,25.41 75.83,25.41 R7.2 75.69,25.48 52.84,25.48 48.68,29.64 R9.2 48.54,29.71 48.2,29.71 47.58,29.09 47.44,29.02 | 47.44,29.02 47.44,27.98 47.23,27.77 46.12,27.77 44.18,29.71 43.77,29.71 R6.2 43.63,29.85 43.63,30.47 31.72,42.38 | 47.44,29.02 46.74,29.71 R5.2 | U1.7 42.03,56.09 42.03,57.27 U1.8 41.9,57.41 40.37,57.41 39.89,57.89 36.29,57.89 35.39,56.99 35.39,55.95 34.28,54.85 U1.3 34.14,54.71 32.83,53.39 32.83,48.75 R8.2 32.69,48.68 32.34,48.68 31.72,48.06 31.72,42.38 | J3.3 164.4,19.8 149.23,19.8 129.71,39.33 C1_BAT2.1 129.57,39.4 127.7,39.4 125.9,37.6 TANT.+ 125.76,37.53 122.36,40.93 122.36,41.2 IC4.5 122.16,41.27 v121.19,41.27 | R_BOOT.2 20.22,107.41 20.22,108.65 R_BOOT.1 | R_BOOT.2 20.08,107.27 14.34,107.27 8.45,101.38 R10.2 8.24,101.31 7.06,100.14 6.72,100.14 C9.1 6.92,100 6.92,91.13 6.3,90.51 5.75,90.51 J4.P4 | 48.54,102.21 49.65,102.21 50.55,103.11 IC1.5 50.69,103.04 C_DELAY.1 52.63,103.11 56.92,107.41 60.18,107.41 R_CHANGE.2 60.25,107.27 60.25,104.15 87.12,77.28 TP16.TP 87.25,77.14 87.25,66.55 89.68,64.13 D7.2 89.75,63.99 89.4,63.64 89.4,62.26 R1_PINH1.2 89.54,62.19 89.82,61.91 92.93,61.91 R2_PINH1.2 93.07,61.77 93.76,61.08 93.76,60.11 | 48.54,102.21 47.85,102.21 IC1.2 | 46.12,107.34 46.12,106.02 48.54,103.6 48.54,102.21 | 46.12,107.34 46.12,107.84 R_RESET.2 | 89.4,58.79 88.5,59.69 88.5,60.11 U3.2
  Top 0.3: 89.4,58.79 92.45,58.79 93.76,60.11 | v21.19,107.34 20.36,107.34 R_BOOT.2 | v46.05,107.34 46.12,107.34 | v110.73,51.73 102.21,51.73 93.9,60.04 93.76,60.11 | v88.16,57.48 89.33,58.66 89.4,58.79 | v84.55,33.52 84.55,25.14 84.03,24.62
  Bottom 0.3: v46.05,107.34 v21.19,107.34 | v110.73,51.73 v121.19,41.27 | v84.55,33.52 84.55,53.88 v88.16,57.48
32KHZ  (via drill 0.3)
  Top 0.15: R2_PINH1.1 92.93,60.52 90.09,60.52 89.75,60.18 U3.1 89.96,60.45 88.78,61.63 88.78,64.06 88.16,64.68 v50.83,64.68 | v36.22,64.68 17.94,46.4 17.94,46.12 U2.9
  Bottom 0.15: v50.83,64.68 v36.22,64.68
DN
  Top 0.15: 162.81,53.74 163.01,53.53 163.57,53.53 J2.B7 | 162.81,53.74 162.81,54.29 163.01,54.5 163.57,54.5 J2.A7 | 162.81,53.74 152.7,53.74 149.72,50.76 148.96,50.76 D1.1
DP  (via drill 0.3)
  Top 0.15: J2.A6 163.64,54.02 164.12,54.02 164.4,54.29 164.4,54.78 164.19,54.98 163.64,54.98 J2.B6 163.57,54.98 v156.64,54.98 | v150.48,48.82 148.96,48.82 D1.3
  Bottom 0.15: v156.64,54.98 v150.48,48.82
EPD_3V3  (via drill 0.3)
  Top 0.3: J1.16 85.66,15.1 86.15,15.1 J1.15 86.15,15.23 86.15,16.07 87.5,17.42 | 87.5,17.42 88.99,18.91 90.65,18.91 92.24,20.5 92.86,20.5 EFD_C5.1 | v75.76,16.55 75.76,15.72 C7.1 | v79.22,23.06 79.22,23.48 79.57,23.82 Q2.2 | v70.01,29.57 68.42,29.57 TP17.TP | v87.39,17.52 87.5,17.42 | L1.2 86.75,28.45 v85.41,28.45
  Bottom 0.3: v75.76,16.55 75.76,19.6 77.87,21.71 | 77.87,21.71 v79.22,23.06 79.36,23.13 80.57,24.34 | 77.87,21.71 v70.01,29.57 | 80.57,24.34 v87.39,17.52 | 80.57,24.34 84.68,28.45 v85.41,28.45
EPD_3V3_C  (via drill 0.3)
  Top 0.3: 82.34,34.07 79.64,31.37 79.64,25.76 Q2.1 | 82.34,34.07 84.76,34.07 85.45,33.38 85.45,32.69 86.49,31.65 87.63,31.65 87.63,25.79 85.11,23.27 84.07,23.27 83.38,23.96 R_CL1.1 | v34.83,74.79 31.3,74.79 20.5,63.99 20.5,63.64 U2.18 | v77.56,74.79 79.98,77.21 TP13.TP | v82.27,36.56 82.27,34.21 82.34,34.07
  Bottom 0.3: v77.56,74.79 77.01,74.79 | 77.01,74.79 v34.83,74.79 | v82.27,36.56 82.27,66.76 77.01,72.02 77.01,74.79
EPD_BUSY  (via drill 0.3)
  Top 0.15: v89.19,17.73 89.19,15.1 J1.9 | v78.67,71.74 69.8,71.74 64.4,77.14 TP9.TP 64.33,77.14 v63.43,76.24 | v11.01,64.75 10.32,64.06 10.32,63.64 U2.26
  Bottom 0.15: v89.19,17.73 89.68,18.21 89.68,60.73 v78.67,71.74 | v11.01,64.75 24.17,64.75 35.66,76.24 v63.43,76.24
EPD_CS  (via drill 0.3)
  Top 0.15: v87.32,15.86 87.6,15.58 87.6,15.1 J1.12 | v61.63,15.37 v49.24,27.77 48.61,28.39 R9.1 | v49.24,30.47 49.24,32.27 48.54,32.96 48.54,33.24 D6.2 | v23.96,42.31 20.5,45.77 20.5,46.05 U2.11 20.5,46.12 20.5,46.4 21.47,47.37 22.99,47.37 34.49,58.86 35.59,58.86 55.19,78.46 64.89,78.46 66.13,77.21 68.35,77.21 TP10.TP
  Bottom 0.15: v87.32,15.86 86.84,15.37 v61.63,15.37 | v49.24,27.77 v49.24,30.47 45.43,30.47 33.59,42.31 v23.96,42.31
EPD_DC  (via drill 0.3)
  Top 0.15: v89.19,18.35 88.16,17.31 88.16,15.1 J1.11 | v77.56,72.23 76.94,72.23 72.02,77.14 TP11.TP 71.95,77.14 v70.57,75.76 | v45.43,75.76 28.67,59 25.48,59 12.88,46.4 12.88,46.12 U2.5
  Bottom 0.15: v89.19,18.35 89.19,60.59 v77.56,72.23 | v70.57,75.76 v45.43,75.76
EPD_RST  (via drill 0.3)
  Top 0.15: v88.64,17.17 88.64,15.1 J1.10 | v82.82,66.34 82.82,68.9 75.83,75.9 75.83,77.08 TP12.TP 75.76,76.73 v74.44,76.73 | v29.5,76.73 16.69,63.92 16.69,63.64 U2.21
  Bottom 0.15: v88.64,17.17 88.64,60.52 v82.82,66.34 | v74.44,76.73 v29.5,76.73
FLASH_CS
  Top 0.15: R5.1 46.67,28.46 46.67,28.67 45.22,30.12 45.22,31.92 46.54,33.24 46.67,33.24 D9.2 46.54,33.31 46.54,54.15 42.1,58.59 35.46,58.59 34.21,57.34 U1.1 34.14,57.27 33.31,57.27 23.13,47.09 22.44,47.09 21.74,46.4 21.74,46.12 U2.12
GDR  (via drill 0.3)
  Top 0.15: v92.59,14.27 92.59,15.03 J1.2 | v78.11,19.18 77.91,19.18 77.56,19.53 77.35,19.53 R4.2 77.28,19.6 76.73,20.15 74.84,20.15 73.91,19.21 73.91,18.09 72.09,16.27 72.09,15.86 Q3.1
  Bottom 0.15: v92.59,14.27 89.54,14.27 84.56,19.25 78.69,19.25 78.62,19.18 v78.11,19.18
GND  (via drill 0.3)
  Top 0.15: C10.2 67.66,107.48 66.2,107.48 65.79,107.89 CHANGE_BUTTON.2 65.72,107.89 CHANGE_BUTTON.1 62.19,107.96 60.8,107.96 60.73,108.03 53.46,108.03 52.91,107.48 C5.2 52.84,107.48 51.31,107.48 50.9,107.89 RESET_BUTTON.2 50.76,107.89 47.37,107.89 RESET_BUTTON.1 47.37,107.82 47.37,107.68 v46.67,106.99 | C_DELAY.2 52.49,101.8 50.07,101.8 49.58,101.31 47.85,101.31 IC1.3 47.78,101.31 47.44,101.31 44.22,104.53 | 44.22,104.53 41.41,107.34 28.12,107.34 C6.2 28.05,107.41 26.18,107.41 25.76,107.82 BOOT_BUTTON.2 25.69,107.89 v24.45,107.89 | v44.25,104.57 44.22,104.53 | D6.1 48.48,31.79 46.74,31.79 D9.1 46.67,31.79 v45.7,31.79 | U1.9 38.09,55.4 36.22,53.53 34.21,53.53 U1.4 34.14,53.46 33.79,53.12 33.79,51.31 | 33.83,48.23 33.79,48.27 33.79,51.31 | 33.83,48.23 34.49,47.58 34.49,47.37 D12.1 | 33.83,48.23 33.79,48.2 32.41,48.2 32.13,47.92 32.13,42.52 42.87,31.79 43.7,31.79 D10.1 43.77,31.79 v44.74,31.79 | U2.29_1 12.26,52.15 12.26,53.32 U2.29_2 12.33,53.32 13.43,53.32 U2.29_5 | U2.29_1 12.33,52.15 13.43,52.15 U2.29_4 13.5,52.15 14.68,52.15 U2.29_7 14.75,52.15 14.75,53.32 U2.29_8 14.75,53.39 14.75,54.57 U2.29_9 14.68,54.64 13.5,54.64 U2.29_6 13.43,54.64 12.26,54.64 U2.29_3 12.26,54.71 12.26,57.27 7.76,61.77 7.76,63.57 U2.28 7.76,63.64 7.76,76.87 16.27,85.39 J4.G1 16.34,85.45 16.34,86.49 17.11,87.25 17.11,90.3 16.34,91.06 J4.G2 16.27,91.13 15.44,91.96 15.44,99.31 14.96,99.79 | v9.83,50.76 7.76,48.68 7.76,46.12 U2.1 | v11.98,51.31 11.98,51.87 12.19,52.08 U2.29_1 | 4.85,92.73 5.68,92.73 J4.P6 | 4.85,92.73 3.05,94.53 3.05,95.5 J4.G4 3.05,95.56 3.05,97.57 6.65,101.17 6.65,101.31 C9.2 6.72,101.38 7.2,101.38 15.1,109.28 20.71,109.28 22.16,107.82 BOOT_BUTTON.1
  Top 0.15: J4.G3 2.08,82.41 2.08,89.89 4.85,92.66 4.85,92.73 | 14.96,99.79 13.78,99.79 13.16,99.17 12.88,99.17 D8.1 | BOOT_BUTTON.1 22.23,107.82 22.23,107.13 14.96,99.86 14.96,99.79 | v33.38,51.31 33.79,51.31 | v23.34,107.89 22.3,107.89 BOOT_BUTTON.1 | R2-USB.2 145.84,49.03 145.84,49.24 145.22,49.86 145.22,59.21 146.39,60.39 TP5.TP | 146.39,61.77 146.39,60.45 TP5.TP | 146.39,61.77 146.39,63.85 TP4.TP | J2.A1 163.64,50.97 163.64,51.18 J2.B12 163.57,51.24 153.18,51.24 R2-USB1.1 153.11,51.38 153.11,51.11 151.8,49.79 151.45,49.79 D1.5 151.8,49.72 152.28,49.24 152.28,48.41 151.66,47.78 151.66,47.09 C4_USB.2 151.59,47.02 151.59,45.77 C4_USB1.2 151.66,45.77 152.21,45.77 153.04,44.94 153.04,40.93 152.77,40.65 | J2.A1 163.64,50.9 163.64,49.65 164.12,49.17 J2.MP3 164.19,49.17 168.07,49.17 J2.MP1 | J2.B1 163.64,57.34 163.64,57.55 J2.A12 | J2.A12 163.64,57.62 163.64,58.86 164.12,59.35 J2.MP4 | J2.MP2 168.07,59.42 164.19,59.42 J2.MP4 | J2.A1 163.71,50.76 164.95,50.76 165.3,51.11 165.3,57.41 164.95,57.76 163.71,57.76 J2.A12 | TP5.TP 146.46,60.39 162.04,60.39 163.57,58.86 J2.MP4 | 153.67,6.92 153.67,8.79 154.43,9.56 SENSOR2.5 154.29,9.49 153.67,10.11 153.67,10.66 154.15,11.15 154.43,11.15 SENSOR2.7 154.5,11.22 154.7,11.22 155.47,11.98 157.34,11.98 SENSOR2.1 157.41,12.05 159.97,12.05 165.37,17.45 165.37,20.15 164.75,20.77 164.47,20.77 J3.4 164.4,20.84 164.4,28.95 152.77,40.58 152.77,40.65 | 153.67,6.92 153.67,6.37 C1.2 | 153.67,6.92 156.92,6.92 157.47,6.37 157.68,6.37 C2.2 | TANT.- 125.83,40.51 126.03,40.72 129.57,40.72 C1_BAT2.2 129.64,40.72 130.74,40.72 130.81,40.65 152.77,40.65
  Top 0.15: 77.53,15.2 77.08,15.65 C7.2 77.08,15.72 77.28,15.93 77.28,18.21 R4.1 | EFD_C2.2 77.49,25.14 76.8,24.45 76.8,22.09 D11.1 76.8,22.02 75.69,22.02 70.7,17.04 | 70.7,13.99 71.33,13.37 71.53,13.37 EFD_C1.2 | 70.7,13.99 69.8,13.99 69.04,13.23 69.04,10.32 69.18,10.18 70.5,10.18 71.4,11.08 SJ1.1 71.4,11.15 73.34,11.15 R2.1 73.47,11.15 77.53,15.2 | 70.7,13.99 70.7,17.04 | J1.17 85.18,15.03 85.18,14.68 86.08,13.78 88.78,13.78 89.61,14.61 89.61,15.03 J1.8 89.68,15.1 89.68,15.44 89.96,15.72 93.35,15.72 | 93.35,15.72 94.11,14.96 94.11,12.6 J1.MP1 94.04,12.6 80.68,12.6 J1.MP2 80.61,12.6 79.86,12.6 78.48,13.99 78.48,14.25 77.53,15.2 | EPD_C12.2 81.02,21.74 82.48,21.74 EPD_C11.2 82.55,21.74 84.07,21.74 EPD_C10.2 84.14,21.81 84.14,22.23 v84.42,22.51 | EFD_C5.2 92.86,21.81 91.06,21.81 EFD_C6.2 89.26,21.74 EFD_C7.2 87.46,21.74 EPD_C8.2 EPD_C9.2 85.73,21.81 85.59,21.95 v85.59,22.51 | D3.1 91.13,29.57 91.13,27.35 90.37,26.59 90.37,25.55 90.44,25.48 92.38,25.48 93.63,26.73 95.29,26.73 95.5,26.52 95.5,24.45 92.93,21.88 EFD_C5.2 | 93.35,15.72 93.35,19.88 93.56,20.08 93.56,21.05 92.86,21.74 EFD_C5.2 | C8.2 92.45,51.66 94.04,51.66 94.94,52.56 C10_SUPERCAP.1 94.8,52.35 95.91,51.24 95.91,49.58 | 87.12,47.51 93.83,47.51 95.91,49.58 | 87.12,47.51 86.91,47.51 85.94,48.48 U3.13 | 130.95,51.52 127.77,51.52 C2_BAT.2 | IC4.2 119.53,40.23 119.66,40.23 120.22,39.68 120.22,38.99 118.49,37.26 118.07,37.26 C1_BAT1.2 118,37.19 117.31,36.49 116.34,36.49 115.16,37.67 115.16,40.03 R1_PWRUSB1.1 115.09,40.1 115.09,40.23 114.4,40.93 114.4,49.58 | 125.83,48.68 124.03,46.88 122.43,46.88 R2_BAT.1
  Top 0.15: 125.83,48.68 125.83,49.44 125.27,50 125.07,50 MCP73831.2 125,50.07 124.72,50.07 122.78,52.01 116.83,52.01 115.79,50.97 115.58,50.97 C1_BAT.2 115.51,50.9 114.4,49.79 114.4,49.58 | 130.95,51.52 130.95,47.78 130.81,47.64 126.94,47.64 125.9,48.68 125.83,48.68 | 114.4,49.58 95.91,49.58 | v87.12,47.37 87.12,47.51 | 146.39,61.77 141.41,61.77 132.96,53.32 132.96,52.22 132.47,51.73 132.47,51.62 132.6,51.5 | v70.64,17.04 70.7,17.04 | 130.95,51.52 131.63,51.52 131.66,51.55 U4.1 132.17,51.5 132.6,51.5 | U4.4 132.13,50.07 132.57,50.07 133.23,50.72 U4.9 | U4.6 134.07,50.55 133.44,50.55 133.24,50.76 U4.9 | 132.6,51.5 133.24,50.86 U4.9
  Bottom 0.15: v44.25,104.57 v46.67,106.99 | v44.74,31.79 v45.7,31.79 55.88,31.79 v70.64,17.04 | v9.83,50.76 11.43,50.76 v11.98,51.31 v33.38,51.31 | v23.34,107.89 v24.45,107.89 | v84.42,22.51 v85.59,22.51 85.59,28.02 85.84,28.27 85.84,30.93 87.12,32.2 v87.12,47.37
GND_TOP
  pour Top: 0.1,111.1 19.2,111.1 19.2,110.1 70.1,110.1 70.1,111.1 92.1,111.1 92.1,67 170,67 170,0.1 96.6,0.1 96.6,10.1 78.1,10.1 78.1,0.1 0.1,0.1
  pour Bottom: 0.1,111.1 19.2,111.1 19.2,110.1 70.1,110.1 70.1,111.1 92.1,111.1 92.1,67 170,67 170,0.1 96.6,0.1 96.6,10.1 78.1,10.1 78.1,0.1 0.1,0.1
GPIO8
  Top 0.15: R1.1 19.18,43.07 19.18,46.05 U2.10
I2C_PW  (via drill 0.3)
  Top 0.15: SENSOR2.6 154.5,10.46 156.37,10.46 157.06,11.15 157.34,11.15 SENSOR2.2 157.41,11.15 157.68,11.15 158.38,10.46 158.38,5.82 157.68,5.12 C2.1 157.68,5.05 156.37,6.37 R2_PINH.2 156.3,6.37 155.05,6.37 R1_PINH.2 154.98,6.37 153.67,5.05 C1.1 153.6,5.12 152.9,5.82 152.9,10.73 | 152.9,10.73 154.15,11.98 154.43,11.98 SENSOR2.8 | v25.55,59.49 21.74,63.29 21.74,63.57 U2.17 | v42.24,59.49 64.68,37.05 82.41,37.05 85.59,33.86 129.71,33.86 152.84,10.73 152.9,10.73
  Bottom 0.15: v42.24,59.49 v25.55,59.49
INT_RTC  (via drill 0.3)
  Top 0.15: U3.3 87.25,60.18 87.25,60.52 88.02,61.29 88.02,62.19 R1_PINH1.1 88.09,62.26 v88.09,63.16 | U2.8 16.69,46.12 16.69,46.4 49.03,78.74 82.13,78.74 83.65,77.21 TP15.TP 83.72,77.14 v83.72,67.52
  Bottom 0.15: v83.72,67.52 v88.09,63.16
IO/BOOT
  Top 0.15: C6.1 28.05,108.72 26.38,108.72 BOOT_BUTTON.3 25.69,109.35 23.96,109.35 | 23.96,109.35 22.3,109.35 BOOT_BUTTON.4 | 23.96,109.35 23.96,107.75 35.66,96.05 35.66,75 24.31,63.64 U2.15
IO/CHANGE  (via drill 0.3)
  Top 0.15: C10.1 67.66,108.79 66.34,108.79 65.79,109.35 CHANGE_BUTTON.3 65.72,109.42 62.33,109.42 CHANGE_BUTTON.4 62.19,109.35 61.63,108.79 60.25,108.79 R_CHANGE.1 60.18,108.72 v59,108.72 | v35.18,84.9 14.13,63.85 14.13,63.64 U2.23
  Bottom 0.15: v59,108.72 v35.18,84.9
MISO  (via drill 0.3)
  Top 0.15: 35.18,48.2 35.18,46.74 35.04,46.6 34,46.6 33.17,47.44 32.83,47.44 R8.1 | 35.18,48.2 34.56,48.82 D12.2 | 34.21,56.3 34.21,56.09 U1.2 | 34.21,56.3 34.97,57.06 34.97,57.13 36.15,58.31 41.97,58.31 42.73,57.55 42.73,55.82 42.1,55.19 41.41,55.19 40.03,53.81 40.03,53.12 35.18,48.27 35.18,48.2 | v15.72,56.65 9.07,63.29 9.07,63.57 U2.27 | v33.79,56.65 34.14,56.3 34.21,56.3 | v4.78,93.42 5.12,93.76 5.89,93.76 J4.P7 | v33.79,58.79 51.94,76.94 TP6.TP
  Bottom 0.15: v4.78,93.42 4.78,89.54 9.83,84.48 9.83,58.03 11.22,56.65 v15.72,56.65 v33.79,56.65 v33.79,58.79
MOSI  (via drill 0.3)
  Top 0.15: v86.7,15.86 86.7,15.1 J1.14 | D11.2 78.39,21.95 79.17,21.18 v79.17,18.72 | v75.76,22.51 75.36,22.91 75.36,23.83 R7.1 | v40.51,53.46 41.97,53.46 U1.5 | v22.51,53.46 15.37,46.33 15.37,46.12 U2.7 | v5.12,88.57 5.89,89.33 J4.P3 | v55.88,69.11 55.88,76.94 TP7.TP | v4,87.5 4,67 v6,65
  Bottom 0.15: v86.7,15.86 81.41,15.86 78.83,18.43 | 78.83,18.43 76.47,16.07 75.62,16.07 75.28,16.41 75.28,19.67 75.76,20.15 v75.76,22.51 75.36,22.91 75.36,23.6 57.55,41.41 57.55,45.43 47.64,55.33 43,55.33 42.55,55.78 | 42.55,55.78 40.51,53.74 v40.51,53.46 v22.51,53.46 14,53.46 14,53.5 13.5,53.5 8,59 8,63 v6,65 | 42.55,55.78 v55.88,69.11 | v79.17,18.72 79.09,18.72 78.87,18.5 78.88,18.49 78.83,18.43 | v4,87.5 5,88.5 v5.12,88.57
N$1
  Top 0.15: R2-USB.1 145.91,50.34 147.36,50.34 152.97,55.95 163.57,55.95 J2.B5
N$2
  Top 0.15: C1_BAT1.1 116.75,37.26 116.75,39.33 116.96,39.54 D2.1 117.03,39.54 117.17,39.4 118.83,39.4 | 118.83,39.4 119.46,39.4 IC4.3 | 118.83,39.4 118.83,40.72 119.32,41.2 119.46,41.2 IC4.1 119.53,41.27 120.29,42.03 126.38,42.03 130.54,46.19 131.23,46.19 Q1.2
N$3
  Top 0.15: R1_BAT.2 120.5,49.03 121.26,49.03 121.74,48.54 124.51,48.54 125,49.03 MCP73831.1
N$4
  Top 0.15: CHG_LED.C 120.5,50.9 120.5,50.62 119.18,49.31 119.18,49.1 R1_BAT.1
N$5
  Top 0.15: R2_BAT.2 122.36,45.57 122.36,45.77 119.87,48.27 119.87,49.58 120.01,49.72 121.74,49.72 122.36,49.1 MCP73831.5
N$10
  Top 0.15: 94.67,29.57 94.94,29.29 96.53,29.29 C4.1 | 94.67,29.57 91.2,26.11 D4.1 | 94.67,29.57 D3.2
N$11
  Top 0.15: R2-USB1.2 153.18,52.77 162.81,52.77 163.01,52.98 163.57,52.98 J2.A5
N$13
  Top 0.15: D7.1 87.6,63.99 87.6,62.88 86.7,61.98 86.7,49.72 87.53,48.89 88.02,48.89 88.64,48.27 R_CAPACITOR.1
N$14
  Top 0.15: J1.5 91.13,15.03 91.13,14.68 89.96,13.5 82.34,13.5 80.05,15.79 80.05,21.61 77.56,24.1 EFD_C2.1
N$15  (via drill 0.3)
  Top 0.15: v90.65,13.57 91.62,14.54 91.62,15.03 J1.4 | v70.29,12.46 70.29,13.3 EFD_C1.1
  Bottom 0.15: v90.65,13.57 71.4,13.57 v70.29,12.46
N$17
  Top 0.15: J1.24 81.65,15.1 81.65,19.8 81.02,20.43 EPD_C12.1
N$19
  Top 0.15: J1.22 82.68,15.1 82.68,19.04 84.07,20.43 EPD_C10.1
N$21
  Top 0.15: J1.20 83.65,15.1 83.65,16.69 87.39,20.43 EPD_C8.1
N$22
  Top 0.15: J1.19 84.21,15.1 84.21,15.51 89.19,20.5 EFD_C7.1
N$23
  Top 0.15: J1.18 84.69,15.1 84.69,15.44 89.12,19.88 90.44,19.88 91,20.43 EFD_C6.1
PREVGH  (via drill 0.3)
  Top 0.15: J1.21 83.17,15.1 83.17,17.87 85.73,20.43 EPD_C9.1 85.52,20.29 v84.97,20.84 | D5.1 82.89,33.17 82.89,32.69 84,31.58 v84,25.35
  Bottom 0.15: v84,25.35 84,22.71 83.93,22.64 83.93,21.88 v84.97,20.84
PREVGL
  Top 0.15: J1.23 82.2,15.1 82.2,20.15 82.48,20.43 EPD_C11.1 82.55,20.5 83.1,21.05 84.55,21.05 84.9,21.4 84.9,22.44 85.45,22.99 90.3,22.99 93.35,26.04 94.6,26.04 D4.2
RESE
  Top 0.15: J1.3 92.1,15.03 92.1,14.4 90.79,13.09 82.34,13.09 81.44,13.98 78.87,13.98 78.75,14.1 78.75,17.92 77.7,18.97 76.52,18.97 75.97,19.53 R3.2 74.64,19.55 74.18,19.1 74.18,17.88 73.41,17.11 73.41,15.86 Q3.2
RESE'
  Top 0.15: SJ1.2 69.87,11.22 69.87,11.43 70.84,12.4 73.34,12.4 R2.2 73.47,12.46 74.99,13.98 75.36,13.98 76.3,14.93 76.3,16.61 75.9,17.02 75.9,18.21 R3.1
RESET  (via drill 0.3)
  Top 0.15: C5.1 52.84,108.79 51.45,108.79 50.9,109.35 RESET_BUTTON.3 50.76,109.42 47.37,109.42 RESET_BUTTON.4 47.3,109.35 44.67,109.35 44.53,109.21 44.53,108.1 45.15,107.48 R_RESET.1 45.22,107.41 45.22,106.37 47.78,103.81 47.78,103.18 IC1.1 47.71,103.18 v46.95,102.42 | v10.32,58.17 10.32,46.12 U2.3
  Bottom 0.15: v10.32,58.17 10.32,65.79 v46.95,102.42
RTC_RST  (via drill 0.3)
  Top 0.15: v23.82,62.46 22.99,63.29 22.99,63.57 U2.16 | v48.61,62.46 83.93,62.46 85.87,60.52 85.87,60.18 U3.4
  Bottom 0.15: v48.61,62.46 v23.82,62.46
RX
  Top 0.15: U2.24 12.88,63.64 12.88,66.2 15.37,68.7 TP2.TP
SCK  (via drill 0.3)
  Top 0.15: v86.77,14.27 87.12,14.61 87.12,15.03 J1.13 | v57.89,14.27 43.77,28.39 R6.1 43.63,28.46 v42.87,29.22 | 43.7,47.23 43.7,33.31 D10.2 v42.87,32.41 | 43.7,47.23 43.7,52.77 42.03,54.43 42.03,54.71 U1.6 42.1,54.71 v43.21,55.82 | v14.96,47.23 14.13,46.4 14.13,46.12 U2.6 14,46.5 v16.5,49 | v43.63,47.23 43.7,47.23 | v4.64,67.03 4.64,90.86 5.33,91.55 5.89,91.55 J4.P5 | v60.18,72.78 60.18,77.08 TP8.TP | v8.5,62 15.5,55 v15.5,50
  Bottom 0.15: v57.89,14.27 v86.77,14.27 | v43.63,47.23 v14.96,47.23 | v43.21,55.82 v60.18,72.78 | v42.87,32.41 v42.87,29.22 | v8.5,62 8.5,63.5 6.5,65.5 6,65.5 4.5,67 v4.64,67.03 | v16.5,49 v15.5,50
SCL  (via drill 0.3)
  Top 0.15: v155.67,5.68 156.3,5.05 R2_PINH.1 | v155.67,7.89 157.34,9.56 SENSOR2.4 | v164.4,17.11 164.4,17.8 J3.1 | v135.38,52.22 134.69,52.22 134.69,51.31 134.48,51.11 134.14,51.11 U4.7 | v91.06,52.22 89.75,50.9 U3.16 | v31.3,77.21 17.94,63.85 17.94,63.64 U2.20
  Bottom 0.15: v155.67,5.68 v155.67,7.89 155.67,7.96 164.4,16.69 v164.4,17.11 164.4,23.13 135.38,52.15 v135.38,52.22 v91.06,52.22 91.06,60.8 86.98,64.89 86.98,66 75.76,77.21 v31.3,77.21
SDA  (via drill 0.3)
  Top 0.15: v155.05,4.29 155.05,4.99 R1_PINH.1 | v155.05,8.31 157.13,10.39 157.34,10.39 SENSOR2.3 | v157.96,12.6 164.12,18.77 164.4,18.77 J3.2 | 134.28,52.77 134.62,52.77 134.62,52.7 135.52,52.7 135.87,52.35 135.87,52.08 135.66,51.87 v135.66,51.24 | v133.93,53.12 134.28,52.77 | v91.55,53.12 90.44,53.12 88.5,51.18 88.5,50.9 U3.15 | v33.03,77.7 19.18,63.85 19.18,63.64 U2.19 | U4.8 134.14,51.59 134.14,52.56 134.28,52.7 134.28,52.77
  Bottom 0.15: v155.05,4.29 v155.05,8.31 155.05,8.38 157.96,11.29 v157.96,12.6 157.96,28.95 v135.66,51.24 | v133.93,53.12 v91.55,53.12 91.55,60.73 87.25,65.03 87.25,66.13 75.69,77.7 v33.03,77.7
SRC  (via drill 0.3)
  Top 0.15: 87.01,32.72 86.56,33.17 86.36,33.17 D5.2 | C4.2 96.53,30.61 89.17,30.61 87.78,32 87.73,32 87.01,32.72 | v77.56,23.34 77.56,21.47 77.35,21.26 75.56,21.26 73.63,19.33 73.63,18.92 72.71,18 Q3.3 | v86.63,32.34 87.01,32.72
  Top 0.3: v81.37,28.15 81.72,28.5 L1.1
  Bottom 0.15: v77.56,23.34 77.56,24.34 v81.37,28.15 82.44,28.15 v86.63,32.34
SS_SD
  Top 0.15: D8.2 14.34,99.1 13.64,98.4 12.26,98.4 10.66,100 8.31,100 R10.1 8.31,99.93 8.31,90.37 6.3,88.36 J4.P2 6.3,88.22 6.86,87.67 6.86,62.26 11.49,57.62 11.49,46.12 U2.4
TX
  Top 0.15: U2.25 11.49,63.64 11.49,68.63 11.36,68.77 TP1.TP
USB_D+  (via drill 0.3)
  Top 0.15: v57.06,45.29 74.58,45.29 83.65,36.22 118.21,36.22 120.5,38.5 120.5,41.2 121.05,41.76 130.12,41.76 130.95,40.93 152.63,40.93 152.77,41.06 152.77,44.8 152.56,45.01 151.17,45.01 150.97,45.22 150.97,47.51 151.38,47.92 151.38,48.75 D1.4 | v25.07,45.29 24.31,46.05 U2.14
  Bottom 0.15: v25.07,45.29 v57.06,45.29
USB_D-  (via drill 0.3)
  Top 0.15: v150.34,50.76 151.38,50.76 D1.6 | v87.74,65.16 48.54,65.16 v42.87,59.49 | v30.61,53.95 22.99,46.33 22.99,46.12 U2.13
  Bottom 0.15: v150.34,50.76 137.46,50.76 123.06,65.16 v87.74,65.16 | v42.87,59.49 37.33,53.95 v30.61,53.95
VBAT  (via drill 0.3)
  Top 0.3: 125.58,50.73 125.34,50.97 125.07,50.97 MCP73831.3 | 125.58,50.73 127.97,48.34 130.26,48.34 Q1.3 130.33,48.48 130.47,48.61 v130.47,49.17 | 125.58,50.73 127.7,52.84 C2_BAT.1 127.83,52.77 128.32,52.28 131.92,52.28 131.92,52.98 141.89,62.95 141.89,64.06 TP3.TP | v131.44,49.72 131.44,50.28 131.51,50.41 131.57,50.48 131.99,50.48 U4.3 132.13,50.55 132.13,51.04 U4.2
  Bottom 0.3: v131.44,49.72 131.02,49.72 v130.47,49.17
VBUS
  Top 0.3: 118,50.9 116.89,50.9 C1_BAT.1 | 118,50.9 CHG_LED.A 119.18,50.97 119.8,51.59 121.12,51.59 121.67,51.04 122.36,51.04 MCP73831.4 | R1_PWRUSB1.2 115.16,41.41 116.75,41.41 116.96,41.62 D2.2 117.1,41.76 117.79,42.45 118,42.45 | 118,42.45 120.5,42.45 124.23,46.19 129.29,46.19 Q1.1 129.5,46.19 129.98,46.19 133.43,49.64 134.56,49.64 135.61,50.69 140.92,50.69 141.82,51.59 141.96,51.66 | 118,42.45 118,50.9 | 148.06,48.34 148.06,49.24 148.54,49.72 148.89,49.72 D1.2 | 148.06,48.34 149.3,47.09 150.13,47.09 C4_USB.1 150.27,47.02 150.27,45.77 C4_USB1.1 150.34,45.64 150.34,45.29 151.73,43.9 151.73,43 PFMF.050.1.2 | 141.96,51.66 141.96,60.45 TP14.TP | 141.96,51.66 145.29,48.34 148.06,48.34
VRTC  (via drill 0.3)
  Top 0.3: C10_SUPERCAP.2 94.94,50.34 92.45,50.34 C8.1 92.31,50.28 91.55,49.51 88.09,49.51 | 88.09,49.51 87.25,50.34 87.25,50.83 U3.14 | v86.5,49 87,48.5 87.5,48.5 R_CAPACITOR.2 | v88,49.5 88.09,49.51
  Bottom 0.3: v86.5,49 87.5,49 v88,49.5
VUSB  (via drill 0.3)
  Top 0.3: J2.A9 163.64,56.78 163.64,56.58 J2.B4 163.78,56.51 164.26,56.51 164.81,55.95 164.81,52.56 164.33,52.08 163.78,52.08 J2.B9 163.64,52.01 163.64,51.73 J2.A4 163.5,51.73 v156.02,51.73 | v148.4,44.11 147.29,43 PFMF.050.1.1
  Bottom 0.3: v148.4,44.11 v156.02,51.73